# Altium PCB PCB2.PcbDoc
Units mm, origin at the board's own origin, x right, y up, seen from the top; angles counter-clockwise.
Board outline 44 x 45 mm, 2 copper layers (Top Layer, Bottom Layer), stack 1.571 mm thick; 18 components, 16 nets, 138 pads, 41 vias.
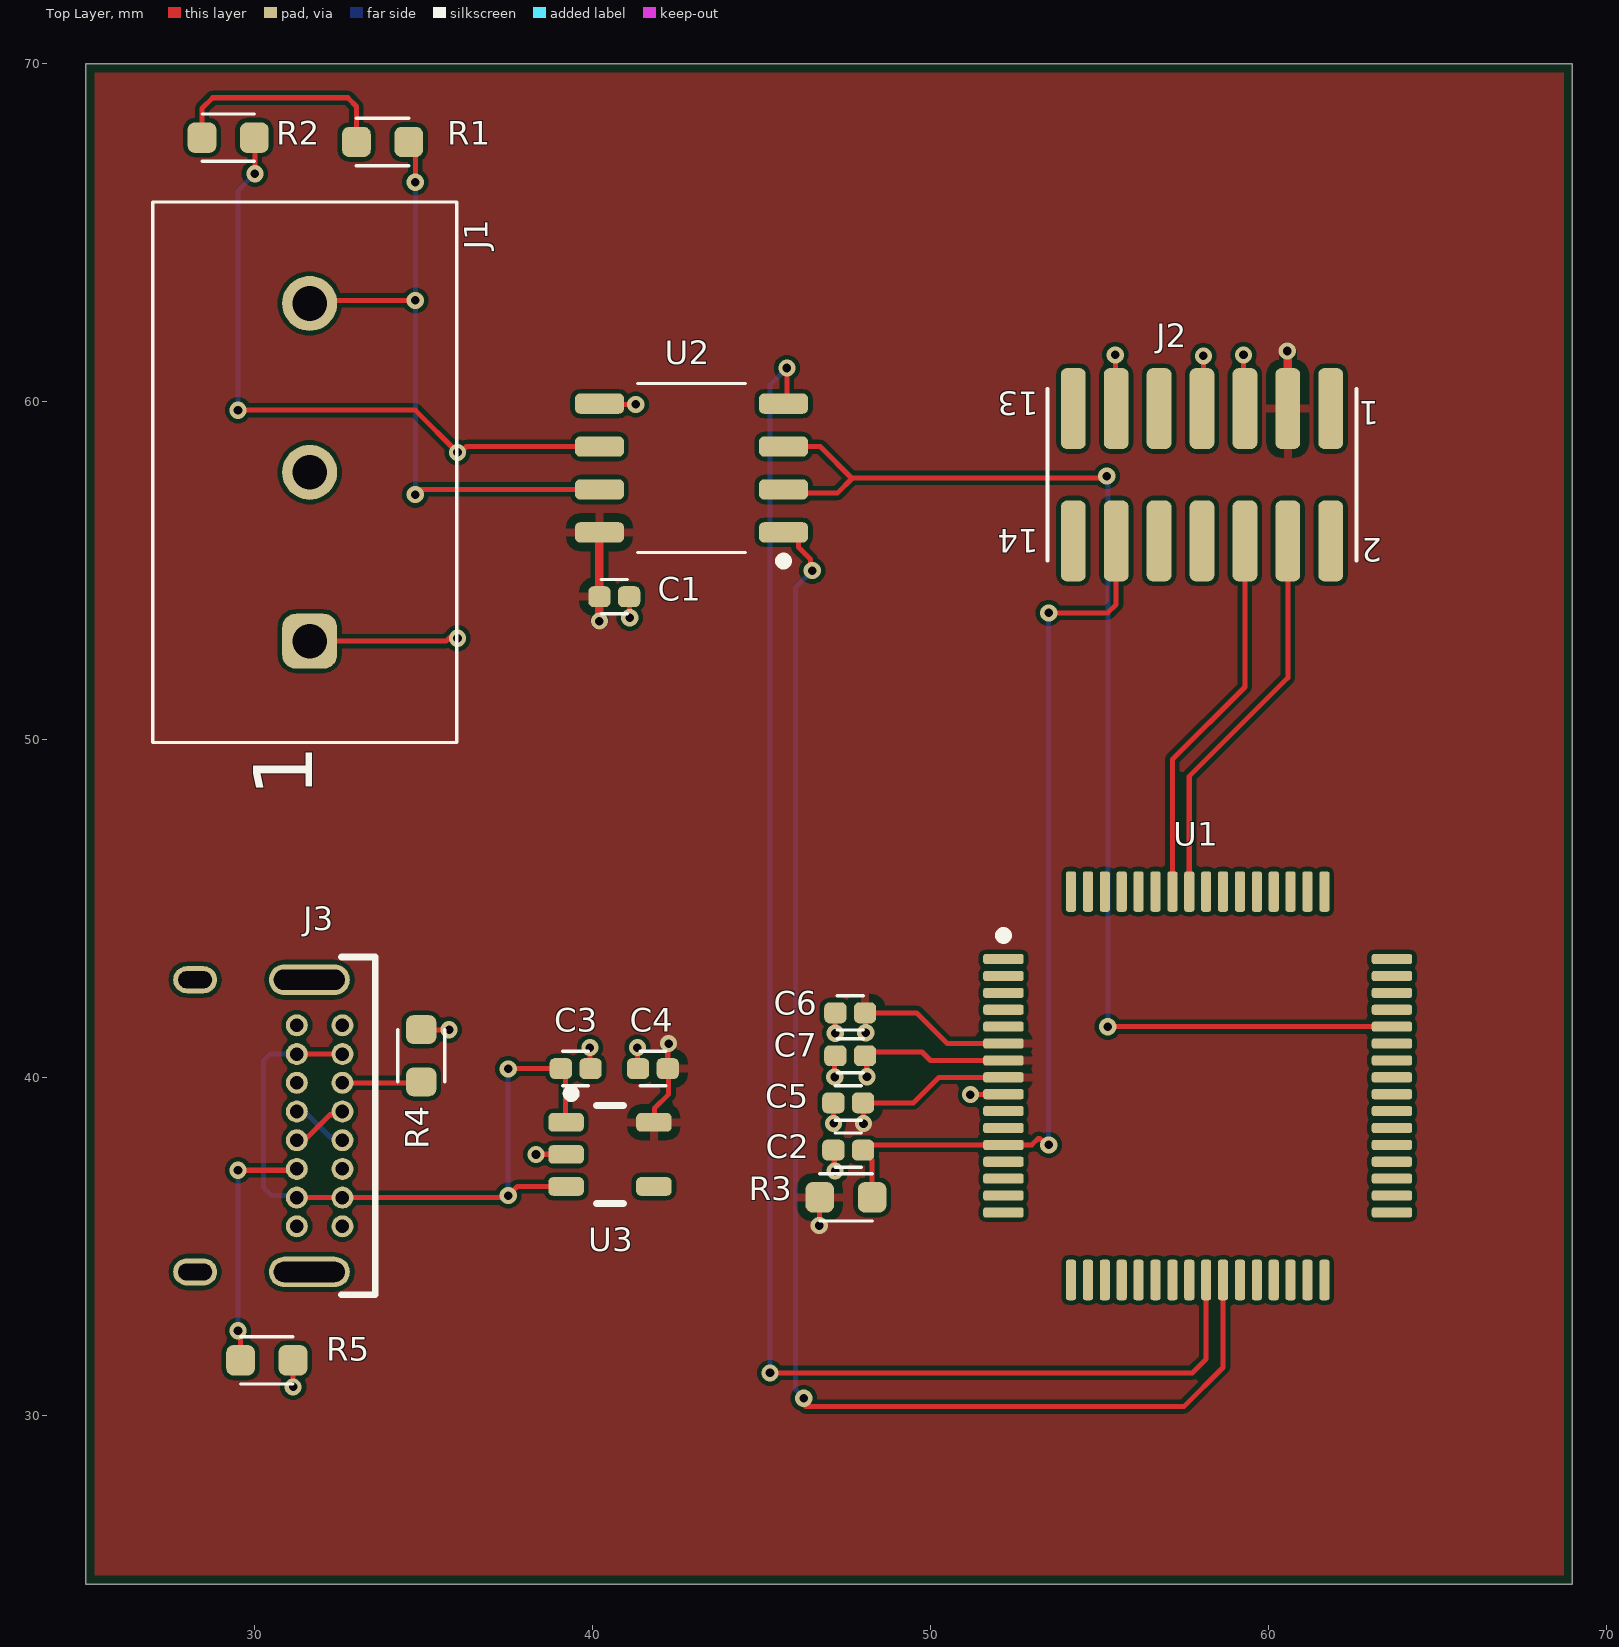
[diagram p0: Top Layer view]
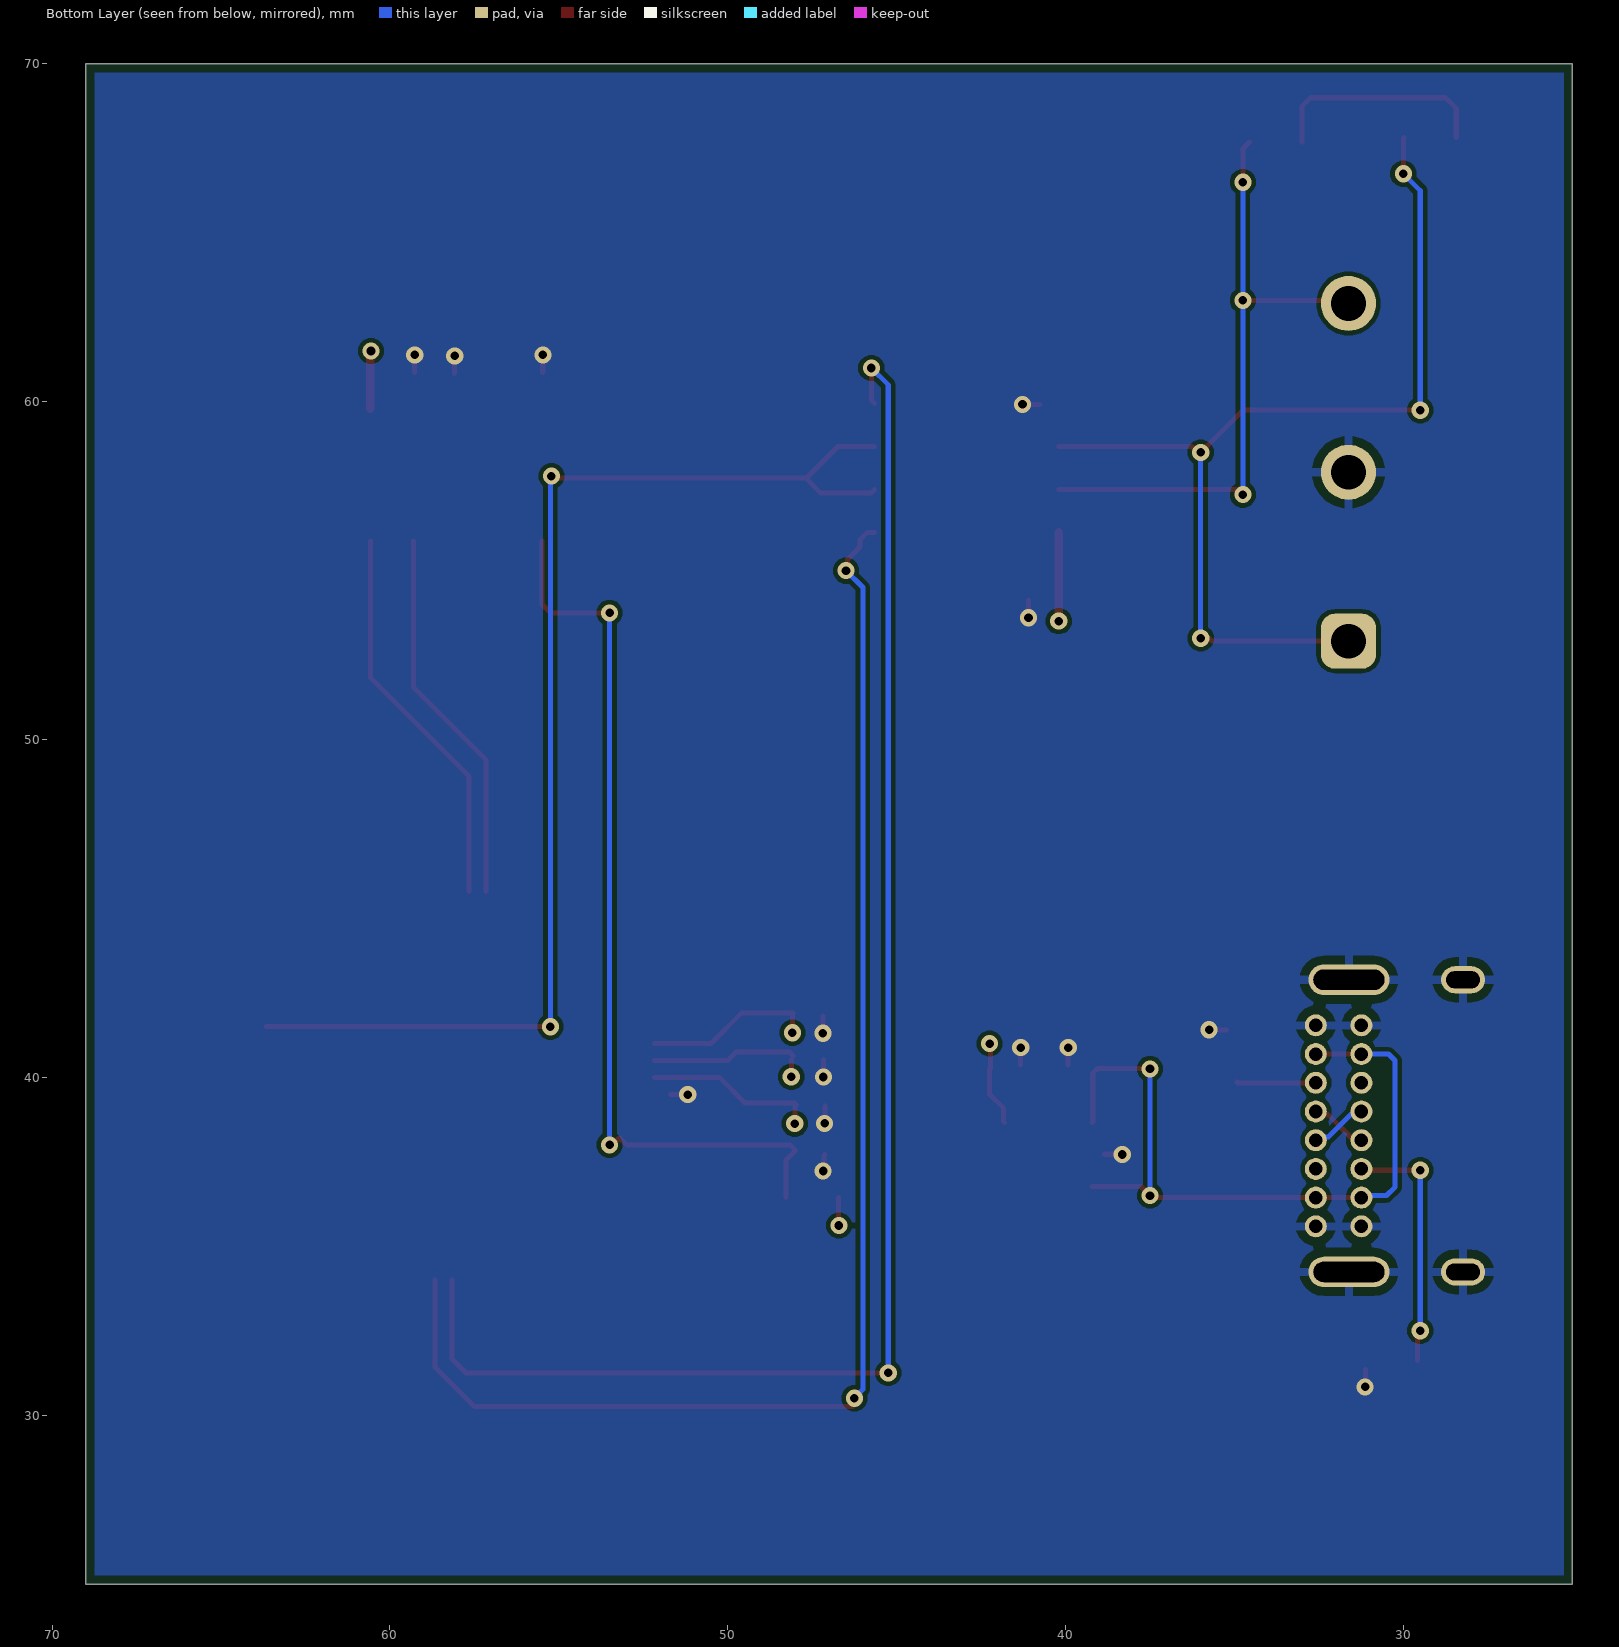
[diagram p1: Bottom Layer view, seen from below]
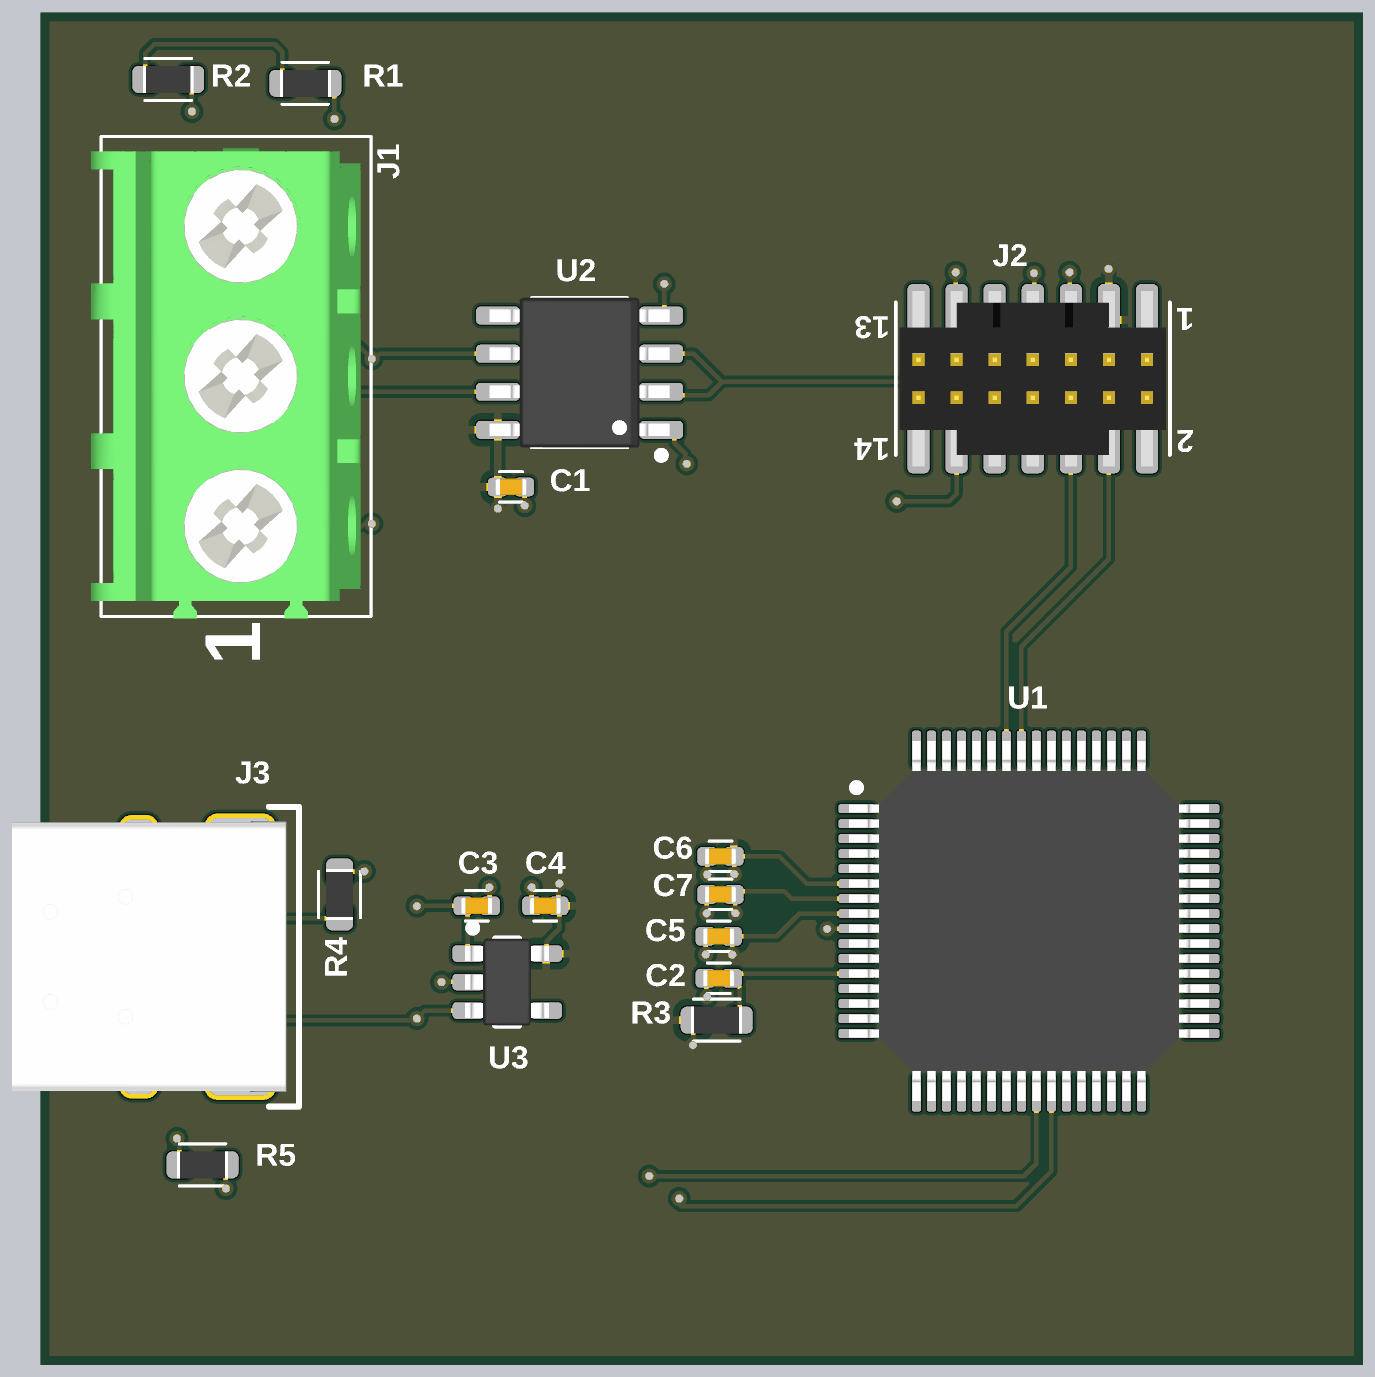
[diagram p2: 3D render of the assembled board from above, using the file's embedded part models]

## Layer stack, top to bottom
Top Solder: solder mask 0.0102, Solder Resist, Dk 3.5
Top Layer: signal copper 0.0356
Dielectric 1: dielectric 1.5, FR-4, Dk 4.8
Bottom Layer: signal copper 0.0356
Bottom Solder: solder mask 0.0102, Solder Resist, Dk 3.5

## Board outline
25,25 25,70 69,70 69,25

## Design rules (kind name [scope] priority, off if disabled: settings)
BoardOutlineClearance [All] p1: gap=0.25 ignorepadtopadclearanceinfootprint=FALSE
Clearance [All] p1: gap=0.127 ignorepadtopadclearanceinfootprint=FALSE
MinimumSolderMaskSliver [All] p1: minsoldermaskwidth=0.099
PolygonConnect [All] p1: thpad.connectstyle=Relief thpad.reliefconductorwidth=0.254 thpad.reliefentries=4 thpad.polygonreliefangle="90 Angle" thpad.airgapwidth=0.254 smdpad.connectstyle=Relief smdpad.reliefconductorwidth=0.254 smdpad.reliefentries=4 smdpad.polygonreliefangle="90 Angle" smdpad.airgapwidth=0.254 via.connectstyle=Direct via.reliefconductorwidth=0.254 via.reliefentries=4 via.polygonreliefangle="90 Angle" via.airgapwidth=0.254
RoutingVias [All] p1: holewidth=0.254 width=0.508 viastyle="Through Hole" minholewidth=0.254 minwidth=0.508 maxholewidth=0.254 maxwidth=0.508
SilkToSilkClearance [All] p1: silktosilkclearance=0.1
SilkToSolderMaskClearance [IsPad] p1: minsilkscreentomaskgap=0.1 clearancetoexposedcopper=TRUE
SolderMaskExpansion [All] p1: expansion=0.05 istentingtop=FALSE
SupplyNets "Schematic Supply Nets_2" [InNet('GND')] p1: voltage=0.000
SupplyNets "Schematic Supply Nets_1" [InNet('+3.3V')] p2: voltage=0.000
SupplyNets "Schematic Supply Nets" [InNet('+5V')] p3: voltage=0.000
Width [All] p1: maxlimit=0.254 minlimit=0.127 preferedwidth=0.15
27 further rules are at their usual default settings.

## Components (designator, comment, footprint, x,y, rotation, side; value= is the part's Value field where it differs from the comment)
C1 "100nF" "C0402 - MURATA" 40.64,54.229 r180 top
C2 "100nF" "C0402 - MURATA" 47.566,37.846 r0 top
C3 "100nF" "C0402 - MURATA" 39.497,40.259 r180 top
C4 "100nF" "C0402 - MURATA" 41.783,40.259 r0 top
C5 "100nF" "C0402 - MURATA" 47.566,39.243 r0 top
C6 "100nF" "C0402 - MURATA" 47.625,41.91 r0 top
C7 "100nF" "C0402 - MURATA" 47.625,40.64 r0 top
J1 "1935174" "1935174 - PHOENIX" 31.473,57.912 r90 top
J2 "STDC14" FTSH-107-01-L-DV-K-P-TR 58.039,57.839 r180 top
J3 "USB4085-GF-A" "USB4085-GF-A - GCT - 071422" 28.567,38.564 r270 top
R1 "120mΩ" "R0603 - YAGEO" 33.782,67.691 r0 top
R2 "0Ω" "R0603 - YAGEO" 29.21,67.818 r0 top
R3 "10kΩ" "R0603 - YAGEO" 47.498,36.449 r180 top
R4 "5.1kΩ" "R0603 - YAGEO" 34.925,40.64 r270 top
R5 "5.1kΩ" "R0603 - YAGEO" 30.353,31.623 r180 top
U1 "STM32G0B1RET6" "64-LQFP - STM" 57.912,39.751 r0 top
U2 "MAX3485CSA+T" "8-SOIC - ANALOG" 42.926,58.039 r180 top
U3 "LDLN030G33R" "TSOT-23-5 - STM" 40.513,37.719 r0 top

## Footprints (in the part's own frame and the unit in brackets; to place one, negate y for a bottom-side part, rotate by r counter-clockwise, add the part's x,y. Pads: shape width x height; smd on the part's side, far side on the other; paste and mask are expansions set on the pad)
"8-SOIC - ANALOG" [mm]
  rrect50% 1.45x0.6 smd: 1(-2.725,1.905) 2(-2.725,0.635) 3(-2.725,-0.635) 4(-2.725,-1.905) 5(2.725,-1.905) 6(2.725,-0.635) 7(2.725,0.635) 8(2.725,1.905)
  silkscreen extent -2.85,-2.5 1.6,2.88, body extent -3,-2.5 3,2.5, height 1.75
"64-LQFP - STM" [mm] "CQFP, 64-Leads, Body 12.00x12.00mm, Pitch 0.50mm, IPC Medium Density"
  rrect50% 1.2x0.3 smd: 1(-5.75,3.75) 2(-5.75,3.25) 3(-5.75,2.75) 4(-5.75,2.25) 5(-5.75,1.75) 6(-5.75,1.25) 7(-5.75,0.75) 8(-5.75,0.25) 9(-5.75,-0.25) 10(-5.75,-0.75) 11(-5.75,-1.25) 12(-5.75,-1.75) 13(-5.75,-2.25) 14(-5.75,-2.75) 15(-5.75,-3.25) 16(-5.75,-3.75) 33(5.75,-3.75) 34(5.75,-3.25) 35(5.75,-2.75) 36(5.75,-2.25) 37(5.75,-1.75) 38(5.75,-1.25) 39(5.75,-0.75) 40(5.75,-0.25) 41(5.75,0.25) 42(5.75,0.75) 43(5.75,1.25) 44(5.75,1.75) 45(5.75,2.25) 46(5.75,2.75) 47(5.75,3.25) 48(5.75,3.75)
  rrect50% 0.3x1.2 smd: 17(-3.75,-5.75) 18(-3.25,-5.75) 19(-2.75,-5.75) 20(-2.25,-5.75) 21(-1.75,-5.75) 22(-1.25,-5.75) 23(-0.75,-5.75) 24(-0.25,-5.75) 25(0.25,-5.75) 26(0.75,-5.75) 27(1.25,-5.75) 28(1.75,-5.75) 29(2.25,-5.75) 30(2.75,-5.75) 31(3.25,-5.75) 32(3.75,-5.75) 49(3.75,5.75) 50(3.25,5.75) 51(2.75,5.75) 52(2.25,5.75) 53(1.75,5.75) 54(1.25,5.75) 55(0.75,5.75) 56(0.25,5.75) 57(-0.25,5.75) 58(-0.75,5.75) 59(-1.25,5.75) 60(-1.75,5.75) 61(-2.25,5.75) 62(-2.75,5.75) 63(-3.25,5.75) 64(-3.75,5.75)
  silkscreen extent -5.87,4.33 -5.63,4.57, body extent -6,-6 6,6, height 1.55
"1935174 - PHOENIX" [mm]
  rrect50% 1.63x1.63 hole 1.03: 1(-5,-0.15)
  round 1.63 hole 1.03: 2(0,-0.15) 3(5,-0.15)
  silkscreen extent -8,-4.5 8,4.5, body extent -8.06,-4.16 7.61,4.84, height 11.3
"C0402 - MURATA" [mm]
  rrect50% 0.66x0.62 smd: 1(-0.44,0) 2(0.44,0)
  silkscreen extent -0.38,-0.51 0.38,0.51, body extent -0.53,-0.28 0.53,0.28, height 0.55
FTSH-107-01-L-DV-K-P-TR [mil]
  rrect50% 29x94.25 smd: 1(-150,-77.13) 2(-150,77.13) 3(-100,-77.13) 4(-100,77.13) 5(-50,-77.13) 6(-50,77.13) 7(0,-77.13) 8(0,77.13) 9(50,-77.13) 10(50,77.13) 11(100,-77.13) 12(100,77.13) 13(150,-77.13) 14(150,77.13)
  silkscreen extent -180,-100 180,100, body extent -175,-115 175,115, height 242
"R0603 - YAGEO" [mm]
  rrect50% 0.85x0.9 smd: 1(-0.775,0) 2(0.775,0)
  silkscreen extent -0.77,-0.7 0.77,0.7, body extent -0.85,-0.45 0.85,0.45, height 0.55
"TSOT-23-5 - STM" [mm]
  rrect50% 1.05x0.55 smd: 1(-1.3,0.95) 2(-1.3,0) 3(-1.3,-0.95) 4(1.3,-0.95) 5(1.3,0.95)
  silkscreen extent -1.27,-1.45 0.4,1.92, body extent -1.4,-1.45 1.4,1.45, height 1.1
"USB4085-GF-A - GCT - 071422" [mm] "USB4085-GF-A"
  round 0.65 hole 0.4: A1(-2.975,4.025) A4(-2.125,4.025) A5(-1.275,4.025) A6(-0.425,4.025) A7(0.425,4.025) A8(1.275,4.025) A9(2.125,4.025) A12(2.975,4.025) B1(2.975,2.675) B4(2.125,2.675) B5(1.275,2.675) B6(0.425,2.675) B7(-0.425,2.675) B8(-1.275,2.675) B9(-2.125,2.675) B12(-2.975,2.675)
  oval 0.9x2.4 hole 0.6 slot 2.1 at 90 deg: SHIELD(-4.325,3.045) SHIELD(4.325,3.045)
  oval 0.8x1.3 hole 0.5 slot 1 at 90 deg: SHIELD(-4.325,-0.335) SHIELD(4.325,-0.335)
  silkscreen extent -5,4 5,5, body extent -4.51,-4.59 4.51,4.59, height 3.48

## Part data
C1 C2 C3 C4 C5 C6 C7: library part "CAP - GENERIC", "Cap Ceramic 0.1uF 50V X7R 10% Pad SMD 0603 Soft Termination 125C Automotive T/R", .Case/Package=0603, .Rated DC Voltage (URdc)=50V, Case Code (Metric)=1608, Dielectric=X7R, Dielectric Material=Ceramic, Manufacturer=Murata, Manufacturer Lifecycle Status="IN PRODUCTION", Manufacturer Part Number=GCJ188R71H104KA12D, Max Operating Temperature=125°C, Min Operating Temperature=-55°C, Ratings=AEC-Q200, Tolerance=10%, .Date=050525, Case Code (Imperial)=0603, Case/Package=0603, Category="Ceramic Capacitors", ComponentLink1Description=https://datasheet.octopart.com:443/GCJ188R71H104KA12D-Murata-datasheet-68586835.pdf?src-supplier=Newark, ComponentLink1URL=https://datasheet.octopart.com:443/GCJ188R71H104KA12D-Murata-datasheet-68586835.pdf?src-supplier=Newark, ComponentLink2Description=https://datasheet.octopart.com:443/GCJ188R71H104KA12D-Murata-datasheet-140654765.pdf?src-supplier=Ciiva, ComponentLink2URL=https://datasheet.octopart.com:443/GCJ188R71H104KA12D-Murata-datasheet-140654765.pdf?src-supplier=Ciiva, ComponentLink3Description=https://datasheet.octopart.com:443/GCJ188R71H104KA12D-Murata-datasheet-138714437.pdf?src-supplier=Ciiva, ComponentLink3URL=https://datasheet.octopart.com:443/GCJ188R71H104KA12D-Murata-datasheet-138714437.pdf?src-supplier=Ciiva, ComponentLink4Description=https://datasheet.octopart.com:443/GCJ188R71H104KA12D-Murata-datasheet-165611796.pdf?src-supplier=TME, ComponentLink4URL=https://datasheet.octopart.com:443/GCJ188R71H104KA12D-Murata-datasheet-165611796.pdf?src-supplier=TME, ComponentLink5Description=https://datasheet.octopart.com:443/GCJ188R71H104KA12D-Murata-datasheet-12524712.pdf?src-supplier=Future+Electronics, ComponentLink5URL=https://datasheet.octopart.com:443/GCJ188R71H104KA12D-Murata-datasheet-12524712.pdf?src-supplier=Future+Electronics, ComponentLink6Description=https://datasheet.octopart.com/GCJ188R71H104KA12D-Murata-datasheet-14405607.pdf, ComponentLink6URL=https://datasheet.octopart.com/GCJ188R71H104KA12D-Murata-datasheet-14405607.pdf, ComponentLink7Description=http://sigma.octopart.com:80/reach_statement/Murata-company-16.pdf?src-supplier=Compliance+Statements, ComponentLink7URL=http://sigma.octopart.com:80/reach_statement/Murata-company-16.pdf?src-supplier=Compliance+Statements, Depth=800µm, Features="Soft Termination", Height=800µm, Lead Free="Lead Free", Length=1.6mm, Lifecycle Status=Production, Material=Ceramic, Mounting Technology="Surface Mount", Number of Terminals=2, Packaging="Cut Tape", Pricing="4000=0.01499 (USD)", Radiation Hardening=No, REACH SVHC=Yes, RoHS=Compliant, Schedule B="8532240020, 8532240020|8532240020, 8532240020|8532240020|8532240020, 8532240020|8532240020|8532240020|8532240020", Stock=204000, Supplier=Avnet, Supplier Part Number=GCJ188R71H104KA12D, Termination=SMD/SMT, Voltage Rating=50V, Voltage Rating (DC)=50V, Width=800µm
J1: library part "CONN 1X3", "Terminal Block; Printed Circuit; 16 A; 250 V; 5 mm; 3; 5 mm; Soldering Mount", Ambient Temperature Range High=100°C, Color=Green, Current=18A, Current Rating=17.5A, Flammability Rating="UL94 V-0", Manufacturer="Phoenix Contact", Max Current Rating=16A, Max Supply Voltage=250V, Min Operating Temperature=-40°C, Supplier Part Number=70054333, VOLTAGE=300V, Voltage Rating (DC)=320V, Approvals=UL, Category="Terminal Blocks", China RoHS=Non-Compliant, ComponentLink1Description=https://datasheet.octopart.com:443/1935174-Phoenix-Contact-datasheet-181093233.pdf?src-supplier=IHS, ComponentLink1URL=https://datasheet.octopart.com:443/1935174-Phoenix-Contact-datasheet-181093233.pdf?src-supplier=IHS, ComponentLink2Description=https://datasheet.octopart.com:443/1935174-Phoenix-Contact-datasheet-86451116.pdf?src-supplier=Farnell, ComponentLink2URL=https://datasheet.octopart.com:443/1935174-Phoenix-Contact-datasheet-86451116.pdf?src-supplier=Farnell, ComponentLink3Description=https://datasheet.octopart.com:443/PT1%2C5/3-5.0-H-Phoenix-Contact-datasheet-8825747.pdf?src-supplier=element14+APAC, ComponentLink3URL=https://datasheet.octopart.com:443/PT1%2C5/3-5.0-H-Phoenix-Contact-datasheet-8825747.pdf?src-supplier=element14+APAC, ComponentLink4Description=https://datasheet.octopart.com:443/1935174-Phoenix-Contact-datasheet-154783735.pdf?src-supplier=Electro+Sonic, ComponentLink4URL=https://datasheet.octopart.com:443/1935174-Phoenix-Contact-datasheet-154783735.pdf?src-supplier=Electro+Sonic, ComponentLink5Description=https://datasheet.octopart.com:443/1935174-Phoenix-Contact-datasheet-62123024.pdf?src-supplier=RS+(Formerly+Allied+Electronics), ComponentLink5URL=https://datasheet.octopart.com:443/1935174-Phoenix-Contact-datasheet-62123024.pdf?src-supplier=RS+(Formerly+Allied+Electronics), ComponentLink6Description=https://datasheet.octopart.com:443/1935174-Phoenix-Contact-datasheet-9933183.pdf?src-supplier=RS+(Formerly+Allied+Electronics), ComponentLink6URL=https://datasheet.octopart.com:443/1935174-Phoenix-Contact-datasheet-9933183.pdf?src-supplier=RS+(Formerly+Allied+Electronics), ComponentLink7Description=https://datasheet.octopart.com:443/1935174-Phoenix-Contact-datasheet-72435.pdf?src-supplier=RS+(Formerly+Allied+Electronics), ComponentLink7URL=https://datasheet.octopart.com:443/1935174-Phoenix-Contact-datasheet-72435.pdf?src-supplier=RS+(Formerly+Allied+Electronics), ComponentLink8Description=https://datasheet.octopart.com:443/1935174-Phoenix-Contact-datasheet-33522581.pdf?src-supplier=MRO+Stop, ComponentLink8URL=https://datasheet.octopart.com:443/1935174-Phoenix-Contact-datasheet-33522581.pdf?src-supplier=MRO+Stop, ComponentLink9Description=https://datasheet.octopart.com:443/1935174-Phoenix-Contact-datasheet-54829.pdf?src-supplier=DigiKey, ComponentLink9URL=https://datasheet.octopart.com:443/1935174-Phoenix-Contact-datasheet-54829.pdf?src-supplier=DigiKey, ComponentLink10Description=https://datasheet.octopart.com:443/1935174-Phoenix-Contact-datasheet-164875068.pdf?src-supplier=Burklin+Elektronik, ComponentLink10URL=https://datasheet.octopart.com:443/1935174-Phoenix-Contact-datasheet-164875068.pdf?src-supplier=Burklin+Elektronik, Contact Material="Nickel, Tin", Contact Plating=Tin, Depth=9mm, Height=11.55mm, Housing Color=Green, Insulation Material=Nylon, Lead Free="Lead Free", Length=9mm, Lifecycle Status=Production, Manufacturer Part Number=1935174, Material=Nylon, Max Operating Temperature=100°C, Mounting Technology=Screw, Number of Circuits=3, Number of Contacts=3, Number of Levels=1, Number of Poles=3, Number of Positions=3, Number of Positions Per Level=3, Number of Rows=1, Orientation=Straight, Pins=3, Pitch=5mm, Pricing="1=0.74 (USD)", Radiation Hardening=No, REACH SVHC=No, RoHS=Compliant, Stock=132, Stripping Length=5mm, Supplier="RS (Formerly Allied Electronics)", Termination=Solder, Thickness=10mm, Voltage Rating=250V, Weight=2.850006g, Width=15mm, Wire Gauge (Max)=26AWG, Wire Gauge (Min)=12AWG, Wire/Cable Gauge=14AWG
J2: Housing Color=Black, Manufacturer=Samtec, Manufacturer Part Number=FTSH-107-01-L-DV-K-P-TR, Max Operating Temperature=125°C, Min Operating Temperature=-55°C, Category="Headers and Wire Housings", Contact Material=Bronze, Contact Plating=Gold, Depth=3.43mm, Gender=Male, Housing Material=Polymer, Lead Free="Lead Free", Length=8.89mm, Number of Contacts=14, Number of Rows=2, Orientation=Straight, Packaging="Tape and Reel", Pitch=1.27mm, Pricing 1="1=4.81000, 10=4.62000, 100=3.85000 (USD)", Radiation Hardening=No, RoHS=Yes, Stock 1=404, Termination=Solder
J3: "USB4085 Series 20 V PCB Top Mount USB 2.0 Type C Receptacle", Manufacturer="Global Connector Technology", Supplier Part Number 1=2073-USB4085-GF-ACT-ND, Category="USB Connectors", ComponentLink1Description=https://datasheet.ciiva.com/71788/2674755-71788146.pdf?src-supplier=Element14, ComponentLink1URL=https://datasheet.ciiva.com/71788/2674755-71788146.pdf?src-supplier=Element14, ComponentLink2Description=https://datasheet.ciiva.com/71788/usb4085-71788147.pdf?src-supplier=Digi-Key, ComponentLink2URL=https://datasheet.ciiva.com/71788/usb4085-71788147.pdf?src-supplier=Digi-Key, Contact Material="Copper Alloy", Contact Plating=Gold, Gender=Receptacle, Manufacturer Part Number=USB4085-GF-A, Number of Positions=16, Orientation="Right Angle", RoHS=Yes, Stock 1=30576, Supplier 1=Digi-Key, USB Standard="USB 2.0"
R1: library part "RESISTOR - GENERIC", "Fixed Resistor, Metal Glaze/thick Film, 0.1W, 0.12ohm, 0.1095V, 1% +/-Tol, 800ppm/Cel, Surface Mount, 0603", .Case/Package=0603, .Tolerance=1%, Manufacturer="Yageo Group", Manufacturer Part Number=RL0603FR-070R12L, Max Operating Temperature=155°C, Max Power Dissipation=100mW, Min Operating Temperature=-55°C, Supplier Part Number=13-RL0603FR-070R12LCT-ND, Temperature Coefficient=800ppm/°C, Voltage Rating (DC)=100V, Working Voltage=109.5mV, .Date=050325, Case Code (Imperial)=0603, Case/Package=0603, Category="Chip SMD Resistors", China RoHS=Non-Compliant, ComponentLink1Description=https://datasheet.octopart.com:443/RL0603FR-070R12L-Yageo-datasheet-182189623.pdf?src-supplier=IHS, ComponentLink1URL=https://datasheet.octopart.com:443/RL0603FR-070R12L-Yageo-datasheet-182189623.pdf?src-supplier=IHS, ComponentLink2Description=https://datasheet.octopart.com:443/RL0603FR-070R12L-Yageo-datasheet-178203169.pdf?src-supplier=Future+Electronics, ComponentLink2URL=https://datasheet.octopart.com:443/RL0603FR-070R12L-Yageo-datasheet-178203169.pdf?src-supplier=Future+Electronics, ComponentLink3Description=https://datasheet.octopart.com/RL0603FR-070R12L-Yageo-datasheet-10916029.pdf, ComponentLink3URL=https://datasheet.octopart.com/RL0603FR-070R12L-Yageo-datasheet-10916029.pdf, ComponentLink4Description=https://datasheet.octopart.com:443/RL0603FR-070R12L-Yageo-datasheet-8324393.pdf?src-supplier=Farnell, ComponentLink4URL=https://datasheet.octopart.com:443/RL0603FR-070R12L-Yageo-datasheet-8324393.pdf?src-supplier=Farnell, ComponentLink5Description=http://sigma.octopart.com:80/conflict_mineral_statement/Yageo-company-3.pdf?src-supplier=Compliance+Statements, ComponentLink5URL=http://sigma.octopart.com:80/conflict_mineral_statement/Yageo-company-3.pdf?src-supplier=Compliance+Statements, ComponentLink6Description=http://sigma.octopart.com:80/rohs_statement/Yageo-company-2.pdf?src-supplier=Compliance+Statements, ComponentLink6URL=http://sigma.octopart.com:80/rohs_statement/Yageo-company-2.pdf?src-supplier=Compliance+Statements, Composition="Thick Film", Contact Plating=Tin, Height=450µm, Lead Free="Lead Free", Length=1.6002mm, Lifecycle Status=Production, Mounting Technology="Surface Mount", Number of Terminals=2, Number of Terminations=2, Packaging="Tape & Reel (TR)", Power Dissipation=100mW, Power Rating=100mW, Pricing="1=0.15, 10=0.074, 100=0.052, 1000=0.03978 (USD)", Radiation Hardening=No, REACH SVHC=Yes, RoHS=Compliant, Stock=8438, Supplier=DigiKey, Tolerance=1%, Width=800µm
R2: library part "RESISTOR - GENERIC", "GENERAL PURPOSE CHIP RESISTOR Metal Glaze/thick Film, 0.1W, 0ohm, Surface Mount, 0603", .Case/Package=0603, .Tolerance=1%, Manufacturer="Yageo Group", Manufacturer Part Number=RC0603JR-070RL, Max Operating Temperature=155°C, Min Operating Temperature=-55°C, Power Dissipation=100mW, Temperature Coefficient=200ppm/°C, Voltage Rating=50V, .Date=050325, Case Code (Imperial)=0603, Case/Package=0603, Category="Chip SMD Resistors", China RoHS=Non-Compliant, ComponentLink1Description=https://datasheet.octopart.com:443/RC0603JR-070RL-Yageo-datasheet-182189538.pdf?src-supplier=IHS, ComponentLink1URL=https://datasheet.octopart.com:443/RC0603JR-070RL-Yageo-datasheet-182189538.pdf?src-supplier=IHS, ComponentLink2Description=https://datasheet.octopart.com:443/RC0603JR-070RL-Yageo-datasheet-8328172.pdf?src-supplier=element14+APAC, ComponentLink2URL=https://datasheet.octopart.com:443/RC0603JR-070RL-Yageo-datasheet-8328172.pdf?src-supplier=element14+APAC, ComponentLink3Description=https://datasheet.octopart.com:443/RC0603JR-070RL-Yageo-datasheet-17842380.pdf?src-supplier=element14+APAC, ComponentLink3URL=https://datasheet.octopart.com:443/RC0603JR-070RL-Yageo-datasheet-17842380.pdf?src-supplier=element14+APAC, ComponentLink4Description=https://datasheet.octopart.com:443/RC0603JR-070RL-Yageo-datasheet-62067350.pdf?src-supplier=Farnell, ComponentLink4URL=https://datasheet.octopart.com:443/RC0603JR-070RL-Yageo-datasheet-62067350.pdf?src-supplier=Farnell, ComponentLink5Description=https://datasheet.octopart.com:443/RC0603JR-070RL-Yageo-datasheet-15599030.pdf?src-supplier=Future+Electronics, ComponentLink5URL=https://datasheet.octopart.com:443/RC0603JR-070RL-Yageo-datasheet-15599030.pdf?src-supplier=Future+Electronics, ComponentLink6Description=https://datasheet.octopart.com:443/RC0603JR-070RL-Yageo-datasheet-164759695.pdf?src-supplier=Future+Electronics, ComponentLink6URL=https://datasheet.octopart.com:443/RC0603JR-070RL-Yageo-datasheet-164759695.pdf?src-supplier=Future+Electronics, ComponentLink7Description=https://datasheet.octopart.com:443/RC0603JR-070RL-Yageo-datasheet-137700087.pdf?src-supplier=Future+Electronics, ComponentLink7URL=https://datasheet.octopart.com:443/RC0603JR-070RL-Yageo-datasheet-137700087.pdf?src-supplier=Future+Electronics, ComponentLink8Description=https://datasheet.octopart.com:443/RC0603JR-070RL-Yageo-datasheet-27584510.pdf?src-supplier=Future+Electronics, ComponentLink8URL=https://datasheet.octopart.com:443/RC0603JR-070RL-Yageo-datasheet-27584510.pdf?src-supplier=Future+Electronics, ComponentLink9Description=https://datasheet.octopart.com:443/RC0603JR-070RL-Yageo-datasheet-503470.pdf?src-supplier=Future+Electronics, ComponentLink9URL=https://datasheet.octopart.com:443/RC0603JR-070RL-Yageo-datasheet-503470.pdf?src-supplier=Future+Electronics, ComponentLink10Description=https://datasheet.octopart.com:443/RC0603JR-070RL-Yageo-datasheet-12596169.pdf?src-supplier=Newark, ComponentLink10URL=https://datasheet.octopart.com:443/RC0603JR-070RL-Yageo-datasheet-12596169.pdf?src-supplier=Newark, ComponentLink11Description=https://datasheet.octopart.com:443/RC0603JR-070RL-Yageo-datasheet-34211833.pdf?src-supplier=Newark, ComponentLink11URL=https://datasheet.octopart.com:443/RC0603JR-070RL-Yageo-datasheet-34211833.pdf?src-supplier=Newark, ComponentLink12Description=https://datasheet.octopart.com:443/RC0603JR-070RL-Yageo-datasheet-79472498.pdf?src-supplier=Megastar, ComponentLink12URL=https://datasheet.octopart.com:443/RC0603JR-070RL-Yageo-datasheet-79472498.pdf?src-supplier=Megastar, ComponentLink13Description=https://datasheet.octopart.com/RC0603JR-070RL-Yageo-datasheet-73766026.pdf, ComponentLink13URL=https://datasheet.octopart.com/RC0603JR-070RL-Yageo-datasheet-73766026.pdf, ComponentLink14Description=https://datasheet.octopart.com:443/RC0603JR-070RL-Yageo-datasheet-5393049.pdf?src-supplier=element14, ComponentLink14URL=https://datasheet.octopart.com:443/RC0603JR-070RL-Yageo-datasheet-5393049.pdf?src-supplier=element14, ComponentLink15Description=https://datasheet.octopart.com:443/RC0603JR-070RL-Yageo-datasheet-118562.pdf?src-supplier=DigiKey, ComponentLink15URL=https://datasheet.octopart.com:443/RC0603JR-070RL-Yageo-datasheet-118562.pdf?src-supplier=DigiKey, ComponentLink16Description=http://sigma.octopart.com:80/rohs_statement/Yageo-company-2.pdf?src-supplier=Compliance+Statements, ComponentLink16URL=http://sigma.octopart.com:80/rohs_statement/Yageo-company-2.pdf?src-supplier=Compliance+Statements, ComponentLink17Description=http://sigma.octopart.com:80/conflict_mineral_statement/Yageo-company-3.pdf?src-supplier=Compliance+Statements, ComponentLink17URL=http://sigma.octopart.com:80/conflict_mineral_statement/Yageo-company-3.pdf?src-supplier=Compliance+Statements, Composition="Thick Film", Contact Plating=Tin, Depth=800µm, Height=450µm, Lead Free="Lead Free", Length=1.6mm, Lifecycle Status=Production, Military Standard=Not, Mounting Technology="Surface Mount", Number of Terminals=2, Packaging="Cut Tape", Pins=2, Power Rating=100mW, Pricing="5000=0.00139, 10000=0.00135, 20000=0.00131, 30000=0.00129, 40000=0.00126 (USD)", Radiation Hardening=No, REACH SVHC=Yes, RoHS=Compliant, Stock=1110000, Supplier=Avnet, Supplier Part Number=RC0603JR-070RL, Termination=SMD/SMT, Tolerance=1%, Voltage Rating (DC)=50V, Width=800µm
R3: library part "RESISTOR - GENERIC", "100mW Thick Film Resistors 75V ±100ppm/℃ ±1% 10kΩ 0603 Chip Resistor - Surface Mount ROHS", .Case/Package=0603, .Tolerance=1%, Manufacturer="Yageo Group", Manufacturer Part Number=RC0603FR-0710KL, Max Operating Temperature=155°C, Min Operating Temperature=-55°C, Power Dissipation=100mW, Temperature Coefficient=100ppm/°C, Voltage Rating=75V, Voltage Rating (DC)=50V, .Date=050325, Case Code (Imperial)=0603, Case Code (Metric)=0603, Case/Package=0603, Category="Chip SMD Resistors", China RoHS=Non-Compliant, ComponentLink1Description=https://datasheet.octopart.com:443/RC0603FR-0710KL-Yageo-datasheet-175887523.pdf?src-supplier=IHS, ComponentLink1URL=https://datasheet.octopart.com:443/RC0603FR-0710KL-Yageo-datasheet-175887523.pdf?src-supplier=IHS, ComponentLink2Description=https://datasheet.octopart.com:443/RC0603FR-0710KL-Yageo-datasheet-103092701.pdf?src-supplier=Upverter, ComponentLink2URL=https://datasheet.octopart.com:443/RC0603FR-0710KL-Yageo-datasheet-103092701.pdf?src-supplier=Upverter, ComponentLink3Description=https://datasheet.octopart.com:443/RC0603FR-0710KL-Yageo-datasheet-98239111.pdf?src-supplier=Upverter, ComponentLink3URL=https://datasheet.octopart.com:443/RC0603FR-0710KL-Yageo-datasheet-98239111.pdf?src-supplier=Upverter, ComponentLink4Description=https://datasheet.octopart.com:443/RC0603FR-0710KL-Yageo-datasheet-141265859.pdf?src-supplier=Upverter, ComponentLink4URL=https://datasheet.octopart.com:443/RC0603FR-0710KL-Yageo-datasheet-141265859.pdf?src-supplier=Upverter, ComponentLink5Description=https://sigma.octopart.com:443/138820526/technical_drawing/Yageo-RC0603FR-0710KL.pdf?src-supplier=Upverter, ComponentLink5URL=https://sigma.octopart.com:443/138820526/technical_drawing/Yageo-RC0603FR-0710KL.pdf?src-supplier=Upverter, ComponentLink6Description=https://datasheet.octopart.com:443/RC0603FR-0710KL-Yageo-datasheet-8328172.pdf?src-supplier=Farnell, ComponentLink6URL=https://datasheet.octopart.com:443/RC0603FR-0710KL-Yageo-datasheet-8328172.pdf?src-supplier=Farnell, ComponentLink7Description=https://datasheet.octopart.com:443/RC0603FR-0710KL-Yageo-datasheet-13691069.pdf?src-supplier=Farnell, ComponentLink7URL=https://datasheet.octopart.com:443/RC0603FR-0710KL-Yageo-datasheet-13691069.pdf?src-supplier=Farnell, ComponentLink8Description=https://datasheet.octopart.com:443/RC0603FR-0710KL-Yageo-datasheet-62067350.pdf?src-supplier=element14+APAC, ComponentLink8URL=https://datasheet.octopart.com:443/RC0603FR-0710KL-Yageo-datasheet-62067350.pdf?src-supplier=element14+APAC, ComponentLink9Description=https://datasheet.octopart.com:443/RC0603FR-0710KL-Yageo-datasheet-17842380.pdf?src-supplier=element14+APAC, ComponentLink9URL=https://datasheet.octopart.com:443/RC0603FR-0710KL-Yageo-datasheet-17842380.pdf?src-supplier=element14+APAC, ComponentLink10Description=https://datasheet.octopart.com:443/RC0603FR-0710KL-Yageo-datasheet-15599030.pdf?src-supplier=Future+Electronics, ComponentLink10URL=https://datasheet.octopart.com:443/RC0603FR-0710KL-Yageo-datasheet-15599030.pdf?src-supplier=Future+Electronics, ComponentLink11Description=https://datasheet.octopart.com:443/RC0603FR-0710KL-Yageo-datasheet-164759695.pdf?src-supplier=Future+Electronics, ComponentLink11URL=https://datasheet.octopart.com:443/RC0603FR-0710KL-Yageo-datasheet-164759695.pdf?src-supplier=Future+Electronics, ComponentLink12Description=https://datasheet.octopart.com:443/RC0603FR-0710KL-Yageo-datasheet-127823281.pdf?src-supplier=Future+Electronics, ComponentLink12URL=https://datasheet.octopart.com:443/RC0603FR-0710KL-Yageo-datasheet-127823281.pdf?src-supplier=Future+Electronics, ComponentLink13Description=https://datasheet.octopart.com:443/RC0603FR-0710KL-Yageo-datasheet-137700087.pdf?src-supplier=Future+Electronics, ComponentLink13URL=https://datasheet.octopart.com:443/RC0603FR-0710KL-Yageo-datasheet-137700087.pdf?src-supplier=Future+Electronics, ComponentLink14Description=https://datasheet.octopart.com:443/RC0603FR-0710KL-Yageo-datasheet-27584510.pdf?src-supplier=Future+Electronics, ComponentLink14URL=https://datasheet.octopart.com:443/RC0603FR-0710KL-Yageo-datasheet-27584510.pdf?src-supplier=Future+Electronics, ComponentLink15Description=https://datasheet.octopart.com:443/RC0603FR-0710KL-Yageo-datasheet-8324193.pdf?src-supplier=Future+Electronics, ComponentLink15URL=https://datasheet.octopart.com:443/RC0603FR-0710KL-Yageo-datasheet-8324193.pdf?src-supplier=Future+Electronics, ComponentLink16Description=https://datasheet.octopart.com:443/RC0603FR-0710KL-Yageo-datasheet-12596169.pdf?src-supplier=Newark, ComponentLink16URL=https://datasheet.octopart.com:443/RC0603FR-0710KL-Yageo-datasheet-12596169.pdf?src-supplier=Newark, ComponentLink17Description=https://datasheet.octopart.com:443/RC0603FR-0710KL-Yageo-datasheet-503470.pdf?src-supplier=Newark, ComponentLink17URL=https://datasheet.octopart.com:443/RC0603FR-0710KL-Yageo-datasheet-503470.pdf?src-supplier=Newark, ComponentLink18Description=https://datasheet.octopart.com:443/RC0603FR-0710KL-Yageo-datasheet-34211833.pdf?src-supplier=Newark, ComponentLink18URL=https://datasheet.octopart.com:443/RC0603FR-0710KL-Yageo-datasheet-34211833.pdf?src-supplier=Newark, ComponentLink19Description=https://datasheet.octopart.com:443/RC0603FR-0710KL-Yageo-datasheet-79472498.pdf?src-supplier=Megastar, ComponentLink19URL=https://datasheet.octopart.com:443/RC0603FR-0710KL-Yageo-datasheet-79472498.pdf?src-supplier=Megastar, ComponentLink20Description=https://datasheet.octopart.com/RC0603FR-0710KL-Yageo-datasheet-73766026.pdf, ComponentLink20URL=https://datasheet.octopart.com/RC0603FR-0710KL-Yageo-datasheet-73766026.pdf, ComponentLink21Description=https://datasheet.octopart.com:443/RC0603FR-0710KL-Yageo-datasheet-118562.pdf?src-supplier=DigiKey, ComponentLink21URL=https://datasheet.octopart.com:443/RC0603FR-0710KL-Yageo-datasheet-118562.pdf?src-supplier=DigiKey, ComponentLink22Description=http://sigma.octopart.com:80/conflict_mineral_statement/Yageo-company-3.pdf?src-supplier=Compliance+Statements, ComponentLink22URL=http://sigma.octopart.com:80/conflict_mineral_statement/Yageo-company-3.pdf?src-supplier=Compliance+Statements, ComponentLink23Description=http://sigma.octopart.com:80/rohs_statement/Yageo-company-2.pdf?src-supplier=Compliance+Statements, ComponentLink23URL=http://sigma.octopart.com:80/rohs_statement/Yageo-company-2.pdf?src-supplier=Compliance+Statements, Composition="Thick Film", Depth=800µm, Height=450µm, Lead Free="Lead Free", Lead Pitch=300µm, Length=1.6mm, Lifecycle Status=Production, Military Standard=Not, Mounting Technology="Surface Mount", Number of Terminals=2, Packaging="Tape & Reel", Pins=2, Power Rating=100mW, Pricing="5000=0.00136, 10000=0.00132, 20000=0.00129, 30000=0.00126, 40000=0.00123 (USD)", REACH SVHC=Yes, RoHS=Compliant, Schedule B="8533210045, 8533210045|8533210045|8533210045|8533210045|8533210045|8533210045|8533210045|8533210045|8533210045|8533210045|8533210045|8533210045|8533210045|8533210045|8533210045|8533210045|8533210045|8533210045|8533210045|8533210045|8533210045|8533210045|8533210045|85", Stock=1130000, Supplier=Avnet, Supplier Part Number=RC0603FR-0710KL, Termination=SMD/SMT, Tolerance=1%, Weight=2.012816mg, Width=800µm, Working Voltage=75V
R4 R5: library part "RESISTOR - GENERIC", "Res Thick Film 0603 5.1K Ohm 1% 0.1W(1/10W) ±100ppm/C Pad SMD T/R", .Case/Package=0603, .Tolerance=1%, Manufacturer="Yageo Group", Manufacturer Part Number=RC0603FR-075K1L, Max Operating Temperature=155°C, Max Power Dissipation=100mW, Min Operating Temperature=-55°C, Temperature Coefficient=100ppm/°C, Voltage Rating=75V, Voltage Rating (DC)=50V, .Date=050325, Case Code (Imperial)=0603, Case/Package=0603, Category="Chip SMD Resistors", China RoHS=Non-Compliant, ComponentLink1Description=https://datasheet.octopart.com:443/RC0603FR-075K1L-Yageo-datasheet-175887523.pdf?src-supplier=IHS, ComponentLink1URL=https://datasheet.octopart.com:443/RC0603FR-075K1L-Yageo-datasheet-175887523.pdf?src-supplier=IHS, ComponentLink2Description=https://datasheet.octopart.com:443/RC0603FR-075K1L-Yageo-datasheet-103092701.pdf?src-supplier=Upverter, ComponentLink2URL=https://datasheet.octopart.com:443/RC0603FR-075K1L-Yageo-datasheet-103092701.pdf?src-supplier=Upverter, ComponentLink3Description=https://datasheet.octopart.com:443/RC0603FR-075K1L-Yageo-datasheet-8328172.pdf?src-supplier=Farnell, ComponentLink3URL=https://datasheet.octopart.com:443/RC0603FR-075K1L-Yageo-datasheet-8328172.pdf?src-supplier=Farnell, ComponentLink4Description=https://datasheet.octopart.com:443/RC0603FR-075K1L-Yageo-datasheet-62067350.pdf?src-supplier=Farnell, ComponentLink4URL=https://datasheet.octopart.com:443/RC0603FR-075K1L-Yageo-datasheet-62067350.pdf?src-supplier=Farnell, ComponentLink5Description=https://datasheet.octopart.com:443/RC0603FR-075K1L-Yageo-datasheet-34211833.pdf?src-supplier=element14+APAC, ComponentLink5URL=https://datasheet.octopart.com:443/RC0603FR-075K1L-Yageo-datasheet-34211833.pdf?src-supplier=element14+APAC, ComponentLink6Description=https://datasheet.octopart.com:443/RC0603FR-075K1L-Yageo-datasheet-164759695.pdf?src-supplier=Future+Electronics, ComponentLink6URL=https://datasheet.octopart.com:443/RC0603FR-075K1L-Yageo-datasheet-164759695.pdf?src-supplier=Future+Electronics, ComponentLink7Description=https://datasheet.octopart.com:443/RC0603FR-075K1L-Yageo-datasheet-137700087.pdf?src-supplier=Future+Electronics, ComponentLink7URL=https://datasheet.octopart.com:443/RC0603FR-075K1L-Yageo-datasheet-137700087.pdf?src-supplier=Future+Electronics, ComponentLink8Description=https://datasheet.octopart.com:443/RC0603FR-075K1L-Yageo-datasheet-15599030.pdf?src-supplier=Future+Electronics, ComponentLink8URL=https://datasheet.octopart.com:443/RC0603FR-075K1L-Yageo-datasheet-15599030.pdf?src-supplier=Future+Electronics, ComponentLink9Description=https://datasheet.octopart.com:443/RC0603FR-075K1L-Yageo-datasheet-12596169.pdf?src-supplier=Future+Electronics, ComponentLink9URL=https://datasheet.octopart.com:443/RC0603FR-075K1L-Yageo-datasheet-12596169.pdf?src-supplier=Future+Electronics, ComponentLink10Description=https://datasheet.octopart.com:443/RC0603FR-075K1L-Yageo-datasheet-503470.pdf?src-supplier=Future+Electronics, ComponentLink10URL=https://datasheet.octopart.com:443/RC0603FR-075K1L-Yageo-datasheet-503470.pdf?src-supplier=Future+Electronics, ComponentLink11Description=https://datasheet.octopart.com:443/RC0603FR-075K1L-Yageo-datasheet-148775077.pdf?src-supplier=TME, ComponentLink11URL=https://datasheet.octopart.com:443/RC0603FR-075K1L-Yageo-datasheet-148775077.pdf?src-supplier=TME, ComponentLink12Description=https://datasheet.octopart.com:443/RC0603FR-075K1L-Yageo-datasheet-79472498.pdf?src-supplier=Megastar, ComponentLink12URL=https://datasheet.octopart.com:443/RC0603FR-075K1L-Yageo-datasheet-79472498.pdf?src-supplier=Megastar, ComponentLink13Description=https://datasheet.octopart.com/RC0603FR-075K1L-Yageo-datasheet-73766026.pdf, ComponentLink13URL=https://datasheet.octopart.com/RC0603FR-075K1L-Yageo-datasheet-73766026.pdf, ComponentLink14Description=https://datasheet.octopart.com:443/RC0603FR-075K1L-Yageo-datasheet-118562.pdf?src-supplier=DigiKey, ComponentLink14URL=https://datasheet.octopart.com:443/RC0603FR-075K1L-Yageo-datasheet-118562.pdf?src-supplier=DigiKey, ComponentLink15Description=http://sigma.octopart.com:80/conflict_mineral_statement/Yageo-company-3.pdf?src-supplier=Compliance+Statements, ComponentLink15URL=http://sigma.octopart.com:80/conflict_mineral_statement/Yageo-company-3.pdf?src-supplier=Compliance+Statements, ComponentLink16Description=http://sigma.octopart.com:80/rohs_statement/Yageo-company-2.pdf?src-supplier=Compliance+Statements, ComponentLink16URL=http://sigma.octopart.com:80/rohs_statement/Yageo-company-2.pdf?src-supplier=Compliance+Statements, Composition="Thick Film", Depth=800µm, Features="Moisture Resistant", Height=450µm, Lead Free="Lead Free", Lifecycle Status=Production, Military Standard=Not, Mounting Technology="Surface Mount", Number of Terminals=2, Number of Terminations=2, Packaging="Tape & Reel", Pins=2, Power Dissipation=100mW, Power Rating=100mW, Pricing="5000=0.00112, 10000=0.00111, 20000=0.00109, 30000=0.00107, 40000=0.00105 (USD)", REACH SVHC=Yes, RoHS=Compliant, Schedule B="8533210045, 8533210045|8533210045, 8533210045|8533210045|8533210045, 8533210045|8533210045|8533210045|8533210045", Stock=795000, Supplier=Avnet, Supplier Part Number=RC0603FR-075K1L, Termination=SMD/SMT, Tolerance=1%, Width=800µm, Working Voltage=75V
U1: "RISC Microcontroller, 32-Bit, FLASH, CORTEX-M0 CPU, 64MHz, CMOS, PQFP64", Manufacturer=STMicroelectronics, Category=Microcontrollers, Manufacturer Part Number=STM32G0B1RET6, Pricing="1=5.08, 10=3.88, 50=3.58, 100=3.16, 1000=2.82, 10000=2.77 (USD)", RoHS=Yes, Stock=882
U2: "EAR99 MAX3485 Tape & Reel (TR) RS422RS485 interface transceiver 3.3V 0.000002A 4.9mm 22ns", Case/Package=SOIC, Manufacturer="Analog Devices", Manufacturer Lifecycle Status=PRODUCTION, Max Operating Temperature=70°C, Max Power Dissipation=727mW, Max Supply Voltage=3.6V, Min Operating Temperature=0°C, Min Supply Voltage=3V, Nominal Supply Current=1mA, Operating Supply Voltage=3.3V, Output Current=60mA, Output Voltage=12.5V, Supplier Part Number=73Y3661, Supplier Part Number 1=MAX3485CSA+CT-ND, Category="Buffers, Drivers and Transceivers", ComponentLink1Description=https://octopart.com:443/opatz8j6/c1?t=mIqTuXhyAOvopapMepZOtricAFJLsG1ilhiLLN3PJrzPCzzgDS_JdIbOjtOqNE6alWQjS5ySvodu03orj1JKOkXVdv_grbphuPVP8nY8JYJbLM8nXuQW6VP8M_QxKEEqkXvk2djVqMtDU22R3Wc-pj4iBbqxgJpNJwVh_vdWVB3WBjB-JxoFI04y-uQFDYvAN0krgXh55zNHEoPugH6OLChFiy050BSakhPJAjUXiADyCM7szf8axjTA73M90wcWW7mOZ0oTwYTIn9hEiEt3iI17nZq30F9Vuoy_3wyEJJKVQRfQUs5WxzJo&src-supplier=Analog+Devices, ComponentLink1URL=https://octopart.com:443/opatz8j6/c1?t=mIqTuXhyAOvopapMepZOtricAFJLsG1ilhiLLN3PJrzPCzzgDS_JdIbOjtOqNE6alWQjS5ySvodu03orj1JKOkXVdv_grbphuPVP8nY8JYJbLM8nXuQW6VP8M_QxKEEqkXvk2djVqMtDU22R3Wc-pj4iBbqxgJpNJwVh_vdWVB3WBjB-JxoFI04y-uQFDYvAN0krgXh55zNHEoPugH6OLChFiy050BSakhPJAjUXiADyCM7szf8axjTA73M90wcWW7mOZ0oTwYTIn9hEiEt3iI17nZq30F9Vuoy_3wyEJJKVQRfQUs5WxzJo&src-supplier=Analog+Devices, ComponentLink2Description=https://datasheet.octopart.com:443/MAX3485CSA%2BT-Analog-Devices-datasheet-34184623.pdf?src-supplier=Augswan, ComponentLink2URL=https://datasheet.octopart.com:443/MAX3485CSA%2BT-Analog-Devices-datasheet-34184623.pdf?src-supplier=Augswan, ComponentLink3Description=https://sigma.octopart.com:443/138901689/technical_drawing/Maxim-Integrated-MAX3485CSA%2BT.pdf?src-supplier=ShanghaiCT, ComponentLink3URL=https://sigma.octopart.com:443/138901689/technical_drawing/Maxim-Integrated-MAX3485CSA%2BT.pdf?src-supplier=ShanghaiCT, ComponentLink4Description=https://datasheet.octopart.com:443/MAX3485CSA%2BT-Maxim-Integrated-datasheet-41311393.pdf?src-supplier=Future+Electronics, ComponentLink4URL=https://datasheet.octopart.com:443/MAX3485CSA%2BT-Maxim-Integrated-datasheet-41311393.pdf?src-supplier=Future+Electronics, ComponentLink5Description=https://datasheet.octopart.com:443/MAX3485CSA%2BT-Dallas-Semiconductor-datasheet-13706444.pdf?src-supplier=_legacy+Avnet, ComponentLink5URL=https://datasheet.octopart.com:443/MAX3485CSA%2BT-Dallas-Semiconductor-datasheet-13706444.pdf?src-supplier=_legacy+Avnet, ComponentLink6Description=https://datasheet.octopart.com:443/MAX3485CSA%2BT-Maxim-Integrated-datasheet-15934920.pdf?src-supplier=iiiC, ComponentLink6URL=https://datasheet.octopart.com:443/MAX3485CSA%2BT-Maxim-Integrated-datasheet-15934920.pdf?src-supplier=iiiC, ComponentLink7Description=http://sigma.octopart.com:80/conflict_mineral_statement/Analog-Devices-company-33.pdf?src-supplier=Compliance+Statements, ComponentLink7URL=http://sigma.octopart.com:80/conflict_mineral_statement/Analog-Devices-company-33.pdf?src-supplier=Compliance+Statements, ComponentLink8Description=http://sigma.octopart.com:80/conflict_mineral_statement/Maxim-Integrated-company-65.pdf?src-supplier=Compliance+Statements, ComponentLink8URL=http://sigma.octopart.com:80/conflict_mineral_statement/Maxim-Integrated-company-65.pdf?src-supplier=Compliance+Statements, ComponentLink9Description=http://sigma.octopart.com:80/rohs_statement/Maxim-Integrated-company-66.pdf?src-supplier=Compliance+Statements, ComponentLink9URL=http://sigma.octopart.com:80/rohs_statement/Maxim-Integrated-company-66.pdf?src-supplier=Compliance+Statements, ComponentLink10Description=http://sigma.octopart.com:80/reach_statement/Maxim-Integrated-company-67.pdf?src-supplier=Compliance+Statements, ComponentLink10URL=http://sigma.octopart.com:80/reach_statement/Maxim-Integrated-company-67.pdf?src-supplier=Compliance+Statements, ComponentLink11Description=https://octopart.com:443/opatz8j6/c1?t=m64L-xaEZ2R1jTHJ7EbKIZ9zjyJB3lxESLQ1VC6iQsJY5MbBGBObpHdNd7bSPYLe07Gn7EiSNoCMl2Slv2MwzGYNSLe72vHY9ta9P4JBQ7SYxyvwYOu5ak2qyK3J8BG_FUG4bh5CA01Wiu40KnfKGmXxPZ8OY_sGsYHh19GBc4j9HpoWh0h6K6SOpDlKCNcnTG541f6pNi2nbh2bv5BwrtschXzlR3dPZe29Bu7Gy87HTYcKqfx0zsvJkCMf9_vNU9ezsKKHfu4q3hHL3LSRDZSq8kCHGmKlEkFHM2ABfU4PrTOx6jn09x2j&src-supplier=Compliance+Statements, ComponentLink11URL=https://octopart.com:443/opatz8j6/c1?t=m64L-xaEZ2R1jTHJ7EbKIZ9zjyJB3lxESLQ1VC6iQsJY5MbBGBObpHdNd7bSPYLe07Gn7EiSNoCMl2Slv2MwzGYNSLe72vHY9ta9P4JBQ7SYxyvwYOu5ak2qyK3J8BG_FUG4bh5CA01Wiu40KnfKGmXxPZ8OY_sGsYHh19GBc4j9HpoWh0h6K6SOpDlKCNcnTG541f6pNi2nbh2bv5BwrtschXzlR3dPZe29Bu7Gy87HTYcKqfx0zsvJkCMf9_vNU9ezsKKHfu4q3hHL3LSRDZSq8kCHGmKlEkFHM2ABfU4PrTOx6jn09x2j&src-supplier=Compliance+Statements, Contact Plating=Tin, Data Rate=10Mbps, ESD Protection=No, Interface="RS-422, RS-485", Lifecycle Status=Production, Logic Function=Transceiver, Manufacturer Part Number=MAX3485CSA+T, Mounting Technology="Surface Mount", Number of Drivers=1, Number of Receivers=1, Number of Transceivers=1, Number of Transmitters=1, Pins=8, Pricing="1=5.64, 10=4.31, 25=3.98, 50=3.8, 100=3.62, 250=3.45, 500=3.34, 1000=3.25 (USD)", Propagation Delay=22ns, Radiation Hardening=No, REACH SVHC=Unknown, Receiver Hysteresis=50mV, RoHS=Compliant, Schedule B=8542390000|8542390000|8542390000|8542390000|8542390000, Simplex/Duplex="Half Duplex", Stock=2441, Supplier=Newark, Supplier 1=DigiKey
U3: "LDO Regulator Pos 3.3V 0.3A 5-Pin TSOT-23 T/R", .Case/Package=SOT-23-5, .Reverse Standoff Voltage='', .Saturation Current=', Manufacturer=STMicroelectronics, Max Operating Temperature=125°C, Max Supply Current=360uA, Max Supply Voltage=5.5V, Min Operating Temperature=-40°C, Min Output Voltage=3.3V, Output Current=300mA, Power Supply Rejection Ratio (PSRR)=53dB, Quiescent Current=30uA, Supplier Part Number=511-LDLN030G33R, .Voltage Rating=', Case/Package=SOT-23-5, Category="Voltage Regulators - Linear", ComponentLink1Description=http://www.farnell.com/datasheets/2819117.pdf?src-supplier=Farnell, ComponentLink1URL=http://www.farnell.com/datasheets/2819117.pdf?src-supplier=Farnell, ComponentLink2Description=http://www.st.com/content/ccc/resource/technical/document/datasheet/group3/17/6b/17/5d/59/ae/4b/55/DM00473388/files/DM00473388.pdf/jcr:content/translations/en.DM00473388.pdf?src-supplier=Digikey, ComponentLink2URL=http://www.st.com/content/ccc/resource/technical/document/datasheet/group3/17/6b/17/5d/59/ae/4b/55/DM00473388/files/DM00473388.pdf/jcr:content/translations/en.DM00473388.pdf?src-supplier=Digikey, ComponentLink3Description=http://www.farnell.com/datasheets/2819117.pdf?src-supplier=Newark, ComponentLink3URL=http://www.farnell.com/datasheets/2819117.pdf?src-supplier=Newark, ComponentLink4Description=https://datasheet.octopart.com/LDLN030G33R-STMicroelectronics-datasheet-103422380.pdf?src-supplier=TME, ComponentLink4URL=https://datasheet.octopart.com/LDLN030G33R-STMicroelectronics-datasheet-103422380.pdf?src-supplier=TME, Manufacturer Part Number=LDLN030G33R, Mounting Technology="Surface Mount", Number of Channels=1, Number of Regulators=1, Output Configuration=Positive, Output Type=Fixed, Output Voltage=3.3V, Packaging="Cut Tape", Pricing="1=0.37, 10=0.258, 50=0.23, 100=0.199, 1000=0.168, 10000=0.148 (USD)", RoHS=Yes, RoHS Compliant=Yes, Series=-, Stock=11992, Supplier=Mouser, Supplier 1=Mouser, Supplier Part Number 1=511-LDLN030G33R

## Via types
v1: diameter 0.508, hole 0.254, Top Layer to Bottom Layer, tented both sides, 41 vias

## Nets (pads, with @x,y where several pads share a name; then routed paths per layer and width w, separated by ;. In a path a pad name is that pad's centre, name@x,y a point inside that pad or via, vN(x,y) a via of type N, cw(c..) or ccw(c..) an arc to the next point about the centre after c; other vN are vias at no path point)
+3.3V: C1.2 C4.2 C5.2 C6.2 C7.2 J2.3 R3.2 U1.6 U1.7 U1.8 U2.8 U3.5 | length 22.5
  Top Layer w0.15: U3.5 41.831,38.687 41.831,39.081 42.25,39.5 42.25,40.232 C4.2 42.223,40.973 v1(42.25,41) ; v1(46.709,35.614) 46.716,35.621 46.716,36.442 R3.2 ; C5.2@47.966,39.192 48.012,39.146 48.012,38.635 v1(48.018,38.629) ; C5.2 49.493,39.243 50.251,40.001 U1.8 ; C7.2 48.175,40.75 49.75,40.75 49.999,40.501 U1.7 ; C6.2 49.59,41.91 50.499,41.001 U1.6 ; C6.2@48.079,41.836 48.079,41.326 v1(48.085,41.32) ; C7.2@48.114,40.534 48.114,40.024 v1(48.121,40.017)
  Top Layer w0.254: v1(40.201,53.506) C1.2 U2.8 ; v1(60.563,61.502) 60.579,61.486 J2.3
+5V: C3.2 J3.A4 J3.A9 J3.B4 J3.B9 U3.1 U3.3 | length 22.6
  Top Layer w0.15: J3.B4 J3.A9 37.439,36.439 37.769,36.769 U3.3 ; J3.B9 J3.A4@32.811,40.689 ; v1(37.5,40.25) 37.509,40.259 C3.2 39.196,40.12 39.196,38.686 U3.1
  Bottom Layer w0.15: J3.B4 31.181,36.5 30.5,36.5 30.25,36.75 30.25,40.5 30.439,40.689 J3.B9 ; v1(37.5,36.5) v1(37.5,40.25)
GND: C1.1 C2.1 C3.1 C4.1 C5.1 C6.1 C7.1 J1.2 J2.5 J2.7 J2.11 J3.A1 J3.A12 J3.B1 J3.B12 J3.SHIELD R4.1 R5.1 U1.9 U2.5 U3.2 | length 7.8
  Top Layer w0.15: R5.1@31.127,31.352 31.127,30.841 v1(31.133,30.835) ; R4.1@35.233,41.404 35.744,41.404 v1(35.75,41.411) ; v1(38.323,37.717) 38.329,37.723 U3.2@38.84,37.723 ; v1(39.919,40.88) 39.925,40.874 C3.1@39.925,40.363 ; U2.5@40.758,59.914 41.268,59.914 v1(41.275,59.92) ; C1.1@41.092,54.125 41.092,53.614 v1(41.098,53.608) ; v1(41.325,40.88) 41.331,40.874 C4.1@41.331,40.363 ; C2.1@47.12,37.719 47.152,37.687 47.152,37.254 v1(47.178,37.228) ; C5.1@47.127,39.155 47.127,38.644 v1(47.133,38.638) ; C7.1@47.162,40.527 47.162,40.017 v1(47.168,40.01) ; C6.1@47.176,41.822 47.176,41.312 v1(47.182,41.306) ; v1(51.183,39.49) 51.189,39.496 U1.9@51.7,39.496 ; v1(55.471,61.387) 55.477,61.381 J2.11@55.477,60.871 ; v1(58.081,61.358) 58.087,61.352 J2.7@58.087,60.841 ; v1(59.267,61.387) 59.273,61.381 J2.5@59.273,60.871
MCURX_RS485TX: U1.26 U2.1 | length 42.1
  Top Layer w0.15: U2.1 45.869,56.134 46.088,55.915 46.088,55.697 46.454,55.331 46.454,55.046 v1(46.5,55) ; v1(46.25,30.5) 46.3,30.45 46.3,30.25 57.5,30.25 58.662,31.412 U1.26
  Bottom Layer w0.15: v1(46.25,30.5) 46.25,30.517 46,30.767 46,54.5 v1(46.5,55)
MCUTX_RS485RX: U1.25 U2.4 | length 46.5
  Top Layer w0.15: v1(45.25,31.25) 57.75,31.25 58.162,31.662 U1.25 ; U2.4 45.75,60.043 v1(45.75,61)
  Bottom Layer w0.15: v1(45.25,31.25) 45.25,60.5 v1(45.75,61)
NetJ1_1: J1.1 R2.2 U2.6 | length 29.5
  Top Layer w0.15: v1(29.5,59.75) 34.75,59.75 v1(36,58.5) 36.093,58.5 36.267,58.674 U2.6 ; R2.2 30,67.803 v1(30,66.75) ; J1.1 35.662,52.912 35.75,53 v1(36,53)
  Bottom Layer w0.15: v1(29.5,59.75) 29.5,66.25 v1(30,66.75) ; v1(36,53) v1(36,58.5)
NetJ1_3: J1.3 R1.2 U2.7 | length 19.2
  Top Layer w0.15: J1.3 31.711,63 v1(34.75,63) ; R1.2 34.75,67.498 v1(34.75,66.5) ; v1(34.75,57.25) 34.904,57.404 U2.7
  Bottom Layer w0.15: v1(34.75,57.25) v1(34.75,63) v1(34.75,66.5)
NetJ3_A5: J3.A5 R4.2 | length 2.3
  Top Layer w0.15: J3.A5 34.899,39.839 R4.2
NetJ3_B5: J3.B5 R5.2 | length 7.4
  Top Layer w0.15: v1(29.5,32.5) 29.578,32.422 R5.2 ; v1(29.5,37.25) 31.203,37.25 J3.B5
  Bottom Layer w0.15: v1(29.5,32.5) v1(29.5,37.25)
NetR1_1: R1.1 R2.1 | length 6.7
  Top Layer w0.15: R2.1 28.435,68.685 28.75,69 32.75,69 33.007,68.743 R1.1
NRST: C2.2 J2.12 R3.1 U1.12 | length 27
  Top Layer w0.15: R3.1 48.273,37.556 48.006,37.823 C2.2 48.161,38.001 U1.12 53.001,38.001 53.188,38.188 53.233,38.188 53.421,38 v1(53.5,38) ; v1(53.5,53.75) 55.25,53.75 55.499,53.999 J2.12
  Bottom Layer w0.15: v1(53.5,38) v1(53.5,53.75)
RS485_DE: U1.44 U2.2 U2.3 | length 37
  Top Layer w0.15: U2.2 45.762,57.293 47.244,57.293 47.695,57.744 ; U2.3 46.737,58.674 47.681,57.73 ; 47.666,57.744 55.164,57.744 v1(55.22,57.799) ; v1(55.25,41.5) v1(55.25,41.5) U1.44
  Bottom Layer w0.15: v1(55.22,57.799) 55.25,57.769 v1(55.25,41.5)
SWCLK: J2.6 U1.58 | length 11.3
  Top Layer w0.15: U1.58 57.162,49.412 59.309,51.559 J2.6
SWDIO: J2.4 U1.57 | length 11.6
  Top Layer w0.15: U1.57 57.662,48.912 60.579,51.829 J2.4
USB_N: J3.A7 J3.B7 | length 1.7
  Bottom Layer w0.15: J3.B7 31.338,38.893 31.563,38.893 32.221,38.235 32.496,38.235 J3.A7
USB_P: J3.A6 J3.B6 | length 1.7
  Top Layer w0.15: J3.B6 31.338,38.235 31.567,38.235 32.225,38.893 32.496,38.893 J3.A6
pads on no net: J2.1 J2.2 J2.8 J2.9 J2.10 J2.13 J2.14 J3.A8 J3.B8 U1.1 U1.2 U1.3 U1.4 U1.5 U1.10 U1.11 U1.13 U1.14 U1.15 U1.16 U1.17 U1.18 U1.19 U1.20 U1.21 U1.22 U1.23 U1.24 U1.27 U1.28 U1.29 U1.30 U1.31 U1.32 U1.33 U1.34 U1.35 U1.36 U1.37 U1.38 U1.39 U1.40 U1.41 U1.42 U1.43 U1.45 U1.46 U1.47 U1.48 U1.49 U1.50 U1.51 U1.52 U1.53 U1.54 U1.55 U1.56 U1.59 U1.60 U1.61 U1.62 U1.63 U1.64 U3.4

## Polygon pours and split planes (outlines as drawn)
+3.3V on Top Layer "+3.3V_L01_P000" (solid, pour order 0): 25,25 25,70 69,70 69,25
GND on Bottom Layer "GND_L02_P001" (solid, pour order 1): 70,70 70,25 25,25 25,70

## Silkscreen, mask and mechanical layers (free items; w line width, h text height)
Board Shape:
  the board outline again, w0.1

## Text inside footprints (layer, text, board x,y; h text height)
J1: Top Overlay "1" at 32.27,48.302 h3 r90
J2: Top Overlay "1" at 63.287,60.257 h1.2 r180; Top Overlay "2" at 63.377,56.193 h1.2 r180; Top Overlay "13" at 53.213,60.527 h1.2 r180; Top Overlay "14" at 53.213,56.463 h1.2 r180; Top 3D Body "14" at 54.681,55.875 h1 r180; Top 3D Body "13" at 54.672,60.441 h1 r180; Top 3D Body "2" at 62.318,55.875 h1 r180; Top 3D Body "1" at 62.243,60.447 h1 r180
U2: Top 3D Body "1" at 44.577,56.515 h1 r180
U3: Top 3D Body "1" at 39.878,38.481 h0.5